# Altium PCB modulo_alimentador_pcbdoc.PcbDoc
Units mm, origin at the board's own origin, x right, y up, seen from the top; angles counter-clockwise.
Board outline 85.5 x 31.5 mm, 2 copper layers (Top Layer, Bottom Layer); 36 components, 22 nets, 96 pads, 43 vias.
Unrouted connection lines stored in the file: 3.
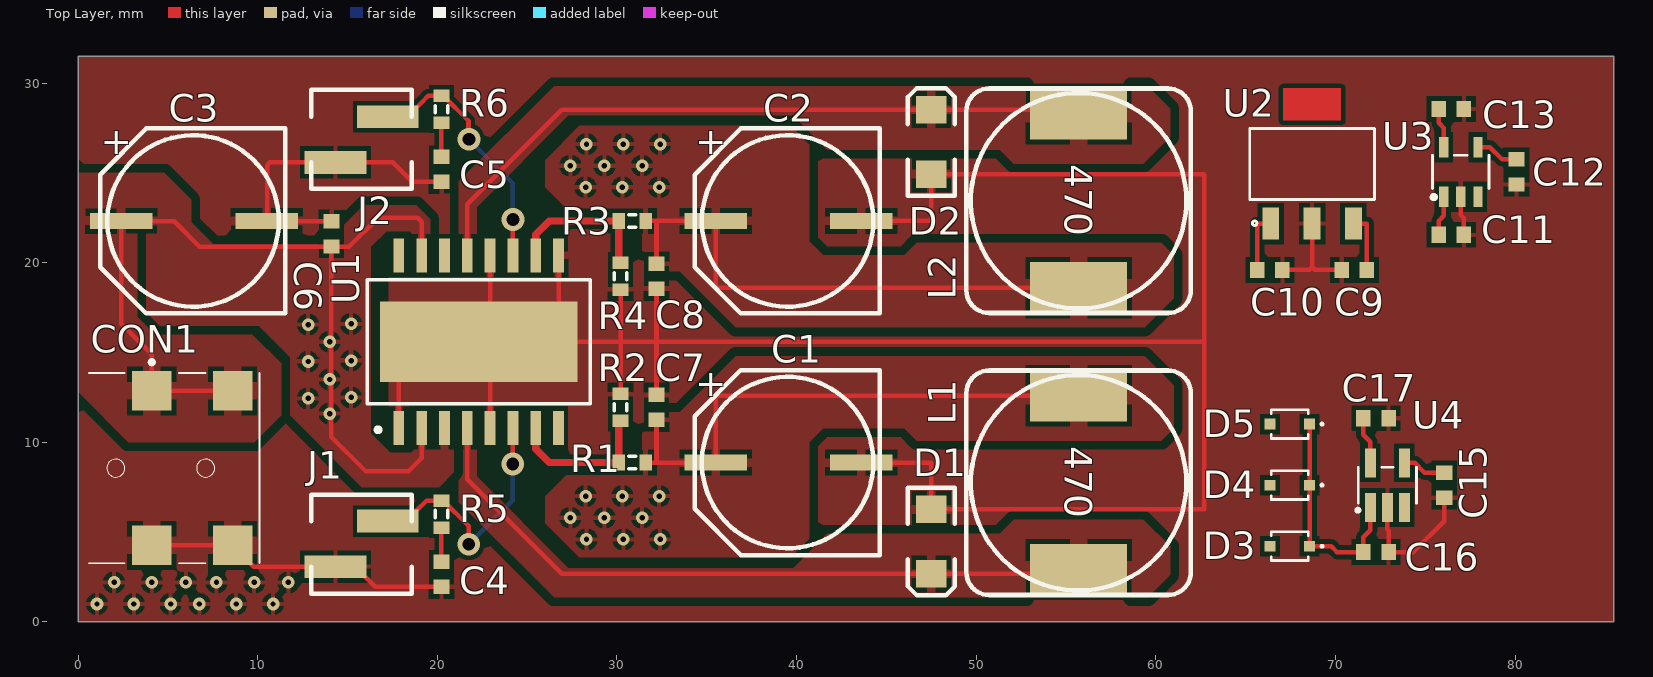
[diagram p0: Top Layer view]
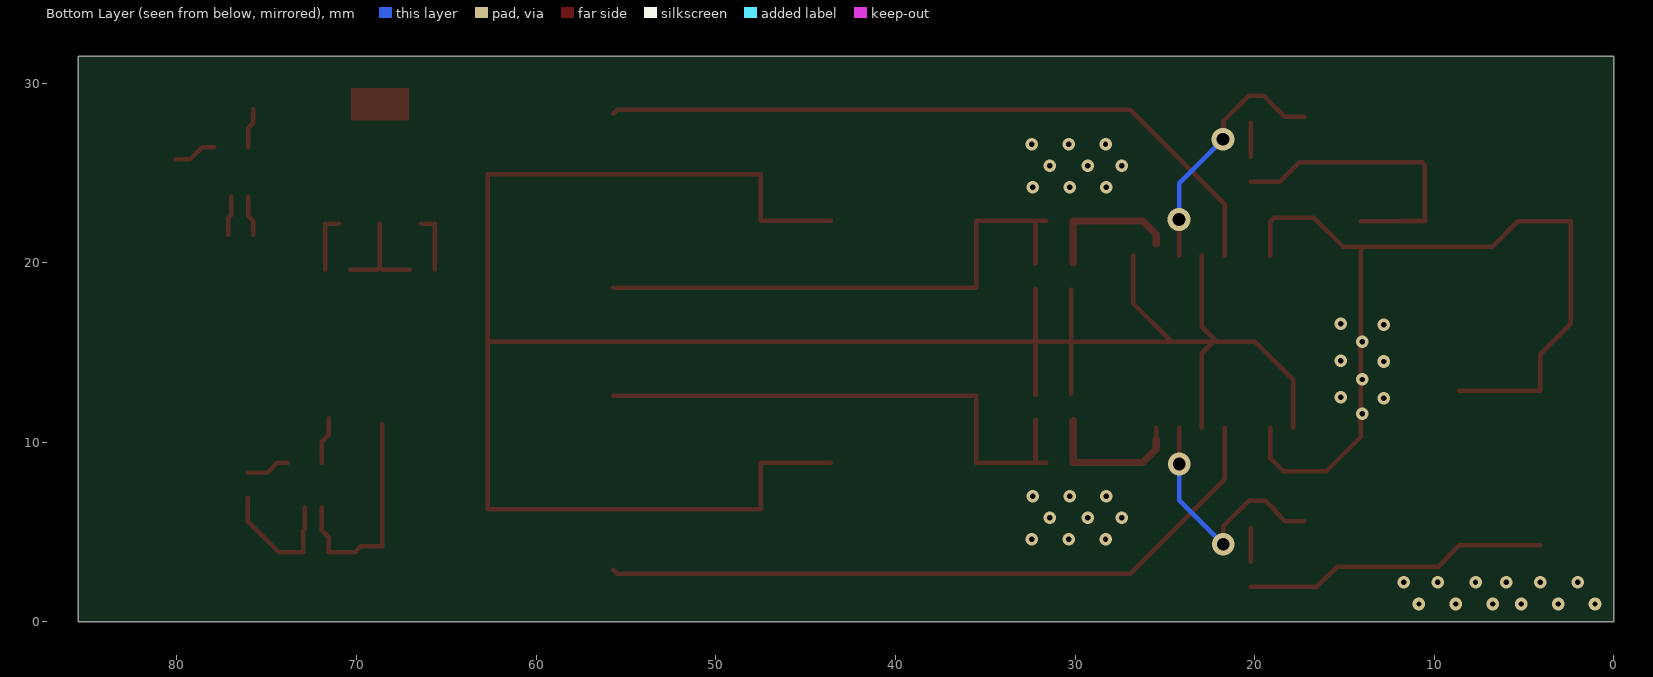
[diagram p1: Bottom Layer view, seen from below]

## Layer stack, top to bottom
Top Solder: solder mask 0.0102, Solder Resist, Dk 3.5
Top Layer: signal copper 0.0356
Dielectric 1: dielectric 0.32, FR-4, Dk 4.8
Bottom Layer: signal copper 0.0356
Bottom Solder: solder mask 0.0102, Solder Resist, Dk 3.5

## Board outline
0,0 0,31.5 85.5,31.5 85.5,0

## Design rules (kind name [scope] priority, off if disabled: settings)
Clearance Clearance_Power [InNetClass('Net_Class_Power')] p1: gap=0.254 ignorepadtopadclearanceinfootprint=FALSE except(0: Arc-Hole Track-Hole SMDPad-Hole THPad-Hole Via-Hole Fill-Hole Poly-Hole Region-Hole Text-Hole; 0.5: Poly-Poly)
Clearance [All] p2: gap=0.254 ignorepadtopadclearanceinfootprint=FALSE except(0: Arc-Hole Track-Hole SMDPad-Hole THPad-Hole Via-Hole Fill-Hole Poly-Hole Region-Hole Text-Hole)
PolygonConnect [All] p1: connectstyle=Relief reliefconductorwidth=0.254 reliefentries=4 polygonreliefangle="90 Angle" airgapwidth=0.254
RoutingVias [All] p1: holewidth=0.711 width=1.27 viastyle="Through Hole" minholewidth=0.711 minwidth=1.27 maxholewidth=0.711 maxwidth=1.27
SolderMaskExpansion [All] p1: expansion=0.102 istentingtop=FALSE
Width Width_FB [InNetClass('Net_Class_FB')] p1: maxlimit=0.5 minlimit=0.254 preferedwidth=0.4
Width [All] p2: maxlimit=0.254 minlimit=0.254 preferedwidth=0.254
30 further rules are at their usual default settings.

## Classes and differential pairs
net class Net_Class_Power: +3V3_MCP1825 +3V3_MIC5301 +3V3_SPI +3V3_STLINK +5V_SPI +5V_STLINK +5V_USB +12V SWout1 SWout2
polygon class Poly_Class_Power: +3V3_SPI +12V_L01_P003 +12V_L01_P004 +12V_L01_P006 +12V_L01_P007 SWOUT1_L01_P011 SWOUT2_L01_P013
net class Net_Class_FB: Vref1 Vref2

## Components (designator, comment, footprint, x,y, rotation, side; value= is the part's Value field where it differs from the comment)
C1 "EEEFC1E471P" PCE4009CT 35.5,8.875 r0 top
C2 "EEEFC1E471P" PCE4009CT 35.5,22.325 r0 top
C3 "EEEFK1H221P" PCE4009CT 2.4,22.325 r0 top
C4 "Cap Semi" 1608[0603] 20.225,2.652 r90 top value=1uF
C5 "Cap Semi" 1608[0603] 20.225,25.198 r90 top value=1uF
C6 "Cap Semi" 1608[0603] 14.1,21.6 r90 top value=100nF
C7 "Cap Semi" 1608[0603] 32.2,11.95 r90 top value=100nF
C8 "Cap Semi" 1608[0603] 32.2,19.25 r270 top value=100nF
C9 "Cap Semi" 1608[0603] 71.052,19.6 r0 top value=1uF
C10 "Cap Semi" 1608[0603] 66.348,19.6 r180 top value=1uF
C11 "Cap Semi" 1608[0603] 76.447,21.554 r0 top value=1uF
C12 "Cap Semi" 1608[0603] 80.076,25.054 r270 top value=10nF
C13 "Cap Semi" 1608[0603] 76.447,28.554 r0 top value=1uF
C15 "Cap Semi" 1608[0603] 76.058,7.615 r270 top value=10nF
C16 "Cap Semi" 1608[0603] 72.258,3.89 r0 top value=1uF
C17 "Cap Semi" 1608[0603] 72.258,11.34 r0 top value=1uF
CON1 "PWR JACK" 694103107102 4.098,4.262 r90 top
D1 "SS26SHE3_A/H" SS26SHE3_A/H 47.5,6.275 r270 top
D2 "SS26SHE3_A/H" SS26SHE3_A/H 47.5,24.925 r90 top
D3 "PMEG1030EJ" PMEG1030EJ 66.358,4.215 r0 top
D4 "PMEG1030EJ" PMEG1030EJ 66.358,7.615 r0 top
D5 "PMEG1030EJ" PMEG1030EJ 66.358,11.015 r0 top
J1 "JUMPER_SMD" JUMPER_SMD 15.785,3.077 r90 top
J2 "JUMPER_SMD" JUMPER_SMD 15.785,28.123 r270 top
L1 "SRR1240-470M" SRR1240-470M 55.7,12.6 r270 top
L2 "SRR1240-470M" SRR1240-470M 55.7,28.3 r270 top
R1 "Res3" J1-0603 30.85,8.875 r0 top value=4K
R2 "Res3" J1-0603 30.2,11.95 r270 top value=1K
R3 "Res3" J1-0603 30.85,22.325 r0 top value=2.3K
R4 "Res3" J1-0603 30.2,19.25 r90 top value=1K
R5 "Res3" J1-0603 20.225,6.002 r90 top value=1K
R6 "Res3" J1-0603 20.225,28.548 r90 top value=1K
U1 "SPI-8001TW" SOP127P1050X275_HS-17N 22.3,15.6 r90 top
U2 "MCP1825S-3302E" MCP1825S-3302E 68.7,25.5 r0 top
U3 "MIC5301-3.3YD5-TR" MIC5301-3.3YD5-TR 76.976,25.054 r90 top
U4 "LD3985M33R" LD3985M33R 72.892,7.615 r90 top value=Value

## Footprints (in the part's own frame and the unit in brackets; to place one, negate y for a bottom-side part, rotate by r counter-clockwise, add the part's x,y. Pads: shape width x height; smd on the part's side, far side on the other; paste and mask are expansions set on the pad)
1608[0603] [mm] "Chip Capacitor, Body 1.6x0.8mm, IPC High Density"
  rect 0.8x0.9 smd: 1(-0.7,0) 2(0.7,0)
  body extent -0.87,-0.48 0.87,0.48, height 1.3
694103107102 [mm]
  rect 2.2x2.2 smd: 1(8.6,-4.5) 1(8.6,0) 2(0,0) 2(0,-4.5)
  silkscreen extent -1,-6 10.3,3.5, body extent -0.6,-5.8 9.2,3.5, height 5.29
J1-0603 [mm] "Chip Resistor, Body 1.6x0.8mm, IPC High Density"
  rect 0.7x0.9 smd: 1(-0.75,0) 2(0.75,0)
  silkscreen extent -0.2,-0.35 0.2,0.35, body extent -0.85,-0.48 0.85,0.48, height 0.9
JUMPER_SMD [mm]
  rect 1.27x3.43 smd: 1(0,1.46) 2(2.54,-1.46)
  silkscreen extent -1.5,-2.8 4,2.8, body extent -1.27,-2.64 3.81,2.64, height 17.21
LD3985M33R [mm]
  rect 1.61x0.608 smd paste+0 mask+0: 1(-1.244,0.95) 2(-1.244,0) 3(-1.244,-0.95) 4(1.244,-0.95) 5(1.244,0.95)
  silkscreen extent -1.46,-1.63 1,1.71, body extent -1.5,-1.5 1.5,1.5, height 1.45
MCP1825S-3302E [mil]
  rect 37x70 smd paste+0 mask+0: 1(-90.55,-130.7) 2(0,-130.7) 3(90.55,-130.7)
  Top Layer region: 63,95.7 63,165.7 -63,165.7 -63,95.7
  silkscreen extent -137,-135 137,78, body extent -132,-144 132,144, height 71
MIC5301-3.3YD5-TR [mil]
  rect 45.5x20 smd paste+0 mask+0: 1(-54.24,37.3) 2(-54.24,-0.1) 3(-54.24,-37.5) 4(54.26,-37.5) 5(54.26,37.3)
  silkscreen extent -59,-62 37,63, body extent -55,-57 55,57, height 39
PCE4009CT [mm]
  rect 3.5x0.9 smd: 1(0,0) 2(8.1,0)
  silkscreen extent -1.18,-5.15 9.12,5.15, body extent -1.77,-5.15 9.83,5.15, height 10.2
PMEG1030EJ [mm]
  rect 0.6x0.6 smd: 1(0,0) 2(2.2,0)
  silkscreen extent 0.07,-0.8 2.91,0.8, body extent -0.15,-0.67 2.35,0.68, height 1
SOP127P1050X275_HS-17N [mm] "SOP, 16-Leads, Body 12,20x7,50mm, Pitch 1,27mm, Thermal Pad 11,00x4,50mm, IPC Medium Density"
  rect 1.9x0.6 smd: 1(-4.8,4.445) 2(-4.8,3.175) 3(-4.8,1.905) 4(-4.8,0.635) 5(-4.8,-0.635) 6(-4.8,-1.905) 7(-4.8,-3.175) 8(-4.8,-4.445) 9(4.8,-4.445) 10(4.8,-3.175) 11(4.8,-1.905) 12(4.8,-0.635) 13(4.8,0.635) 14(4.8,1.905) 15(4.8,3.175) 16(4.8,4.445)
  rect 4.5x11 smd: 17(0,0)
  silkscreen extent -5.02,-6.2 3.45,6.2, body extent -5.15,-5.1 5.15,5.1, height 3.5
SRR1240-470M [mm]
  rect 2.9x5.4 smd: 1(0,0) 2(9.7,0)
  silkscreen extent -1.4,-6.25 11.1,6.25, body extent -1.45,-6.25 11.05,6.25, height 4.5
SS26SHE3_A/H [mm]
  rect 1.52x1.68 smd: 1(0,0) 2(3.6,0)
  silkscreen extent -1.2,-1.3 4.8,1.3, body extent -0.95,-1.4 4.55,1.4, height 2.6

## Part data
C1 C2: "Capacitor 470uf electrolitico", Capacitance=470uF, Case/Package=Radial, ESR (Equivalent Series Resistance)=150mR, Leakage Current=3uA, Manufacturer=Panasonic, Max Operating Temperature=105°C, Min Operating Temperature=-40°C, Package Quantity=1, Ripple Current=670mA, Tolerance=20%, Voltage=25V, Category="Aluminum Electrolytic Capacitors", Contact Plating=Tin, Diameter=10mm, Height=10.2mm, Height - Seated (Max)=0.402inch, Impedance=150mR, Lead Diameter=0.9mm, Lead Free="Lead Free", Lead Pitch=4.6mm, Length=10.5mm, Life (Hours)=1000Hour, Manufacturer Part Number=EEEFC1E471P, Material=Aluminium, Mount="Surface Mount,PCB", Packaging="Tape and Reel", Radiation Hardening=No, REACH SVHC="No SVHC", Ripple Current (AC)=670mA, Termination=SMD/SMT, Voltage Rating=25V, Voltage Rating (DC)=25V, Width=900um
C3: "Capacitor 220uf electrolitico", Capacitance=220uF, Case/Package=Radial, Dielectric Material=Aluminium, ESR (Equivalent Series Resistance)=180mR, Leakage Current=3uA, Manufacturer=Panasonic, Manufacturer Part Number=EEE-FK1H221P, Max Operating Temperature=105°C, Min Operating Temperature=-55°C, Package Quantity=500, Ripple Current=670mA, Tolerance=20%, Voltage=50V, Category="Aluminum Electrolytic Capacitors", Contact Plating=Tin, Diameter=10mm, Height=10.2mm, Height - Seated (Max)=0.413inch, Impedance=180mR, Lead Free="Lead Free", Length=10.2mm, Life (Hours)=2000Hour, Material=Aluminium, Mount="Surface Mount,PCB", Number of Pins=2, Packaging="Tape and Reel", Polarity=Polar, Radiation Hardening=No, REACH SVHC="No SVHC", Ripple Current (AC)=670mA, Termination=SMD/SMT, Voltage Rating=50V, Voltage Rating (DC)=50V, Width=12mm
C4 C5 C6 C7 C8 C9 C10 C11 C12 C13 C15 C16 C17: "Capacitor (Semiconductor SIM Model)", LatestRevisionDate=29-May-2009, LatestRevisionNote="IPC-7351 Footprint Added.", PackageDescription="Chip Capacitor", PackageReference=C1206, Published=8-Jun-2000, Publisher="Altium Limited"
CON1: library part 694103107102, "CONN PWR JACK DC RA SMD", Color=Black, Current Rating=5A, Flammability Rating="UL94 V-0", Insulation Resistance=100MR, Manufacturer="Wurth Electronics", Max Operating Temperature=85°C, Min Operating Temperature=-40°C, Package Quantity=500, Voltage Rating=18V, Category=Connectors, ComponentLink1Description=http://www.mouser.com/ds/2/445/6941xx107102-469263.pdf?src-supplier=Mouser, ComponentLink1URL=http://www.mouser.com/ds/2/445/6941xx107102-469263.pdf?src-supplier=Mouser, ComponentLink2Description=http://www.farnell.com/cad/2130962.pdf?src-supplier=Element14, ComponentLink2URL=http://www.farnell.com/cad/2130962.pdf?src-supplier=Element14, Connector Type=Jack,Power, Contact Gender=Female, Contact Material="Copper Alloy", Contact Plating=Tin, Gender=Male, Housing Material=Polyamide, Manufacturer Part Number=694103107102, Mount="Surface Mount", Packaging="Tape and Reel", Pricing 1="1=1,56000, 10=1,48500, 50=1,32600, 100=1,22000 (USD)", REACH SVHC=Unknown, RoHS=Yes, Shielding=Unshielded, Stock 1=467, Supplier 1=Digi-Key, Termination=SMD/SMT, Voltage Rating (DC)=18V
D1 D2: "Diodo schottky 60V 2A", Average Rectified Current=2A, Case/Package=SMA, Forward Voltage=750mV, Manufacturer=Vishay, Manufacturer Part Number="SS26SHE3\"A/H", Max Forward Surge Current (Ifsm)=40A, Max Operating Temperature=150°C, Max Repetitive Reverse Voltage (Vrrm)=60V, Min Operating Temperature=-55°C, Package Quantity=1800, Peak Reverse Current=10mA, Category="Rectifier Diodes", Element Configuration=Single, Forward Current=2A, Height=2.29mm, Lead Free="Lead Free", Length=4.5mm, Max Reverse Voltage (DC)=60V, Mount="Surface Mount", Number of Pins=2, Packaging="Tape and Reel", Peak Non-Repetitive Surge Current=40A, Radiation Hardening=No, Reverse Voltage (DC)=60V, Termination=SMD/SMT, Weight=0.001199oz, Width=2.79mm
D3 D4 D5: "DIODO SCHOTTKY", Manufacturer=Nexperia, Manufacturer Part Number=PMEG1030EJ,115
J1 J2: "JUMPER SMD Pitch  2.54mm", Color=Black, Manufacturer=Samtec, Manufacturer Part Number=TSM-102-01-L-SV-TR, Max Current Rating=7A, Max Operating Temperature=125°C, Max Voltage Rating (AC)=475V, Min Operating Temperature=-55°C, Category="Headers and Wire Housings", Connector Type="Male Pin", Contact Material=Bronze, Contact Mating Length=0.23inch, Contact Plating=Gold, Depth=2.54mm, Gender=Male, Housing Color=Black, Housing Material=Polymer, Lead Free="Lead Free", Length=5.08mm, Mount="Surface Mount", Number of Contacts=2, Number of Positions=2, Number of Rows=1, Orientation=Straight, Packaging="Tape and Reel", Pitch=2.54mm, Radiation Hardening=No, REACH SVHC="No SVHC", Termination=Solder
L1 L2: "Inductor fijo con nucleo.", Case/Package=Nonstandard, Current Rating=2A, DC Resistance (DCR)=135mR, Frequency=13MHz, Inductance=47uH, Inductance Tolerance=20%, Manufacturer=Bourns, Max Operating Temperature=125°C, Min Operating Temperature=-40°C, Package Quantity=800, Resistance=135MR, Saturation Current=1.8A, Test Frequency=100kHz, Category="Fixed Inductors", Composition=Wirewound, Core Material=Ferrite, DC Current=2A, Depth=12.8mm, Height=4mm, Height - Seated (Max)=0.177inch, Length=12.5mm, Manufacturer Part Number=SRR1240-470M, Material=Steel, Max DC Current=2A, Military Standard=Not, Mount="Surface Mount", Packaging="Cut Tape", Q Factor=19, Radiation Hardening=No, REACH SVHC="No SVHC", RMS Current (Irms)=2A, Self Resonant Frequency=13MHz, Shielding=Shielded, Termination=SMD/SMT, Tolerance=20%, Width=12.5mm
R1 R2 R3 R4 R5 R6: "Resistor", LatestRevisionDate=29-May-2009, LatestRevisionNote="IPC-7351 Footprint Added.", PackageDescription="Chip Resistor", PackageReference=J1-0603, Published=8-Jun-2000, Publisher="Altium Limited"
U1: library part SPI-8001TW-TL, "IC REG BUCK ADJ 1.5A DL 16-HSOP", Case/Package=SOIC, Manufacturer="Allegro MicroSystems Sanken", Max Input Voltage=20V, Max Operating Temperature=135°C, Max Output Voltage=16V, Min Input Voltage=4V, Min Operating Temperature=-30°C, Min Output Voltage=1V, Output Current=1.5A, Package Quantity=1400, Supplier Part Number 1=SPI-8001TW-TLCT-ND, Switching Frequency=250kHz, Category="Voltage Regulators - Switching", ComponentLink1Description=https://datasheet.ciiva.com/29734/spi-8001tw-ds-en-29734001.pdf?src-supplier=Digi-Key, ComponentLink1URL=https://datasheet.ciiva.com/29734/spi-8001tw-ds-en-29734001.pdf?src-supplier=Digi-Key, ComponentLink2Description=https://datasheet.ciiva.com/29733/h1-o03eh0-29733998.pdf?src-supplier=Digi-Key, ComponentLink2URL=https://datasheet.ciiva.com/29733/h1-o03eh0-29733998.pdf?src-supplier=Digi-Key, ComponentLink3Description=https://datasheet.ciiva.com/29733/h1-o03eh0-29733994.pdf?src-supplier=Digi-Key, ComponentLink3URL=https://datasheet.ciiva.com/29733/h1-o03eh0-29733994.pdf?src-supplier=Digi-Key, Manufacturer Part Number=SPI-8001TW-TL, Mount="Surface Mount", Number of Outputs=2, Number of Pins=16, Output Configuration=Positive, Output Type=Adjustable, Packaging="Tape and Reel", Pricing 1="1=3,10000, 10=2,78500, 25=2,63240, 100=2,16450, 250=1,94220, 500=1,87200 (USD)", RoHS=Yes, Stock 1=1392, Supplier 1=Digi-Key, Synchronous Rectifier=No
U2: "MCP1825 Series 500 mA Low Quiescent Current LDO Regulator - SOT-223-3", Manufacturer=Microchip, Manufacturer Part Number=MCP1825S-3302E/DB, Supplier Part Number 1=MCP1825S-3302E/DB-ND, Category="Voltage Regulators - Linear", ComponentLink1Description=https://datasheet.ciiva.com/2040/22056b-2040962.pdf?src-supplier=Digi-Key, ComponentLink1URL=https://datasheet.ciiva.com/2040/22056b-2040962.pdf?src-supplier=Digi-Key, ComponentLink2Description=https://datasheet.ciiva.com/16369/filehandler-aspxddocname-en531698-16369574.pdf?src-supplier=Future+Electronics, ComponentLink2URL=https://datasheet.ciiva.com/16369/filehandler-aspxddocname-en531698-16369574.pdf?src-supplier=Future+Electronics, ComponentLink3Description=https://datasheet.ciiva.com/3224/22056b-3224139.pdf?src-supplier=Avnet, ComponentLink3URL=https://datasheet.ciiva.com/3224/22056b-3224139.pdf?src-supplier=Avnet, ComponentLink4Description=https://datasheet.ciiva.com/8041/514217-8041499.pdf?src-supplier=Element14, ComponentLink4URL=https://datasheet.ciiva.com/8041/514217-8041499.pdf?src-supplier=Element14, Pricing 1="1=0,51000, 25=0,43000, 100=0,39000 (USD)", RoHS=Yes, Stock 1=2086, Supplier 1=Digi-Key
U3: "LDO VOLT REG, 0.15A, 3.3V, TSOT-23-5; Input Voltage Min:2.3V; Input Voltage Max:5.5V; Output Voltage Nom.:3.3V; Output Current:150mA; Dropout Voltage Vdo:40mV; LDO Regulator Case Style:TSOT-23; No. of Pins:5; Operating Temperature Min:-40°C; Operating Temperature Max:125°C; Packaging:Cut Tape; MSL:MSL 1 - Unlimited; SVHC:No SVHC (15-Jun-2015)", Manufacturer=Microchip, Supplier Part Number 1=576-2840-1-ND, Category="Voltage Regulators - Linear", ComponentLink1Description=https://datasheet.ciiva.com/2049/mic5301-2049830.pdf?src-supplier=Digi-Key, ComponentLink1URL=https://datasheet.ciiva.com/2049/mic5301-2049830.pdf?src-supplier=Digi-Key, ComponentLink2Description=https://datasheet.ciiva.com/46425/1670788-46425623.pdf?src-supplier=Element14, ComponentLink2URL=https://datasheet.ciiva.com/46425/1670788-46425623.pdf?src-supplier=Element14, Manufacturer Part Number=MIC5301-3.3YD5-TR, Pricing 1="1=0,59000, 25=0,49000, 100=0,45000 (USD)", RoHS=Yes, Stock 1=2373, Supplier 1=Digi-Key
U4: "LDO Regulator Pos 3.3V 0.55A 5-Pin SOT-23 T/R", Case/Package=SOT-23, Dropout Voltage=60mV, Input Bias Current=85uA, Manufacturer=STMicroelectronics, Max Input Voltage=6V, Max Operating Temperature=125°C, Max Output Current=150mA, Min Current Limit=300mA, Min Input Voltage=2.5V, Min Operating Temperature=-40°C, Min Output Voltage=3.3V, Output Voltage Accuracy=2%, Package Quantity=1, Quiescent Current=150uA, Supplier Part Number 1=497-3504-1-ND, Accuracy=2%, Built_By=EMA_UL_Team, Category="Voltage Regulators - Linear", ComponentLink1Description=https://datasheet.ciiva.com/41440/001185181-da-01-en-ic-reg-ldo-3-3v-ld3985m33r-sot-23-5-stm-41440289.pdf?src-supplier=Conrad, ComponentLink1URL=https://datasheet.ciiva.com/41440/001185181-da-01-en-ic-reg-ldo-3-3v-ld3985m33r-sot-23-5-stm-41440289.pdf?src-supplier=Conrad, ComponentLink2Description=https://datasheet.ciiva.com/26905/ld3985m33r-26905032.pdf?src-supplier=IIIC, ComponentLink2URL=https://datasheet.ciiva.com/26905/ld3985m33r-26905032.pdf?src-supplier=IIIC, ComponentLink3Description=https://datasheet.ciiva.com/2042/cd00003395-2042198.pdf?src-supplier=Digi-Key, ComponentLink3URL=https://datasheet.ciiva.com/2042/cd00003395-2042198.pdf?src-supplier=Digi-Key, ComponentLink4Description=https://datasheet.ciiva.com/2042/cd00003395-2042200.pdf?src-supplier=Digi-Key, ComponentLink4URL=https://datasheet.ciiva.com/2042/cd00003395-2042200.pdf?src-supplier=Digi-Key, ComponentLink5Description=https://datasheet.ciiva.com/2042/cd00003395-2042199.pdf?src-supplier=Digi-Key, ComponentLink5URL=https://datasheet.ciiva.com/2042/cd00003395-2042199.pdf?src-supplier=Digi-Key, ComponentLink6Description=https://datasheet.ciiva.com/16591/cd00003395-16591967.pdf?src-supplier=Avnet+Europe, ComponentLink6URL=https://datasheet.ciiva.com/16591/cd00003395-16591967.pdf?src-supplier=Avnet+Europe, Copyright="Copyright (C) 2018 Accelerated Designs. All rights reserved", Height=1.3mm, Lead Free="Lead Free", Length=3mm, Manufacturer Part Number=LD3985M33R, Manufacturer_Part_Number=LD3985M33R, Mount="Surface Mount", Number of Outputs=1, Number of Pins=5, Number of Regulators=1, Output Current=150mA, Output Type=Fixed, Output Voltage=3.3V, Packaging="Tape and Reel", Polarity=Positive, Pricing 1="1=0,60000, 10=0,52800, 25=0,49600, 100=0,37600, 250=0,32000, 500=0,30400, 1000=0,23200 (USD)", Radiation Hardening=No, RefDes=RefDes, RoHS=Yes, Stock 1=4469, Supplier 1=Digi-Key, Type=DEV, Vendor=STMicroelectronics, Width=1.75mm

## Via types
v1: diameter 0.7, hole 0.3, Top Layer to Bottom Layer, 39 vias
v2: diameter 1.27, hole 0.711, Top Layer to Bottom Layer, 4 vias

## Nets (pads, with @x,y where several pads share a name; then routed paths per layer and width w, separated by ;. In a path a pad name is that pad's centre, name@x,y a point inside that pad or via, vN(x,y) a via of type N, cw(c..) or ccw(c..) an arc to the next point about the centre after c; other vN are vias at no path point)
+3V3_MCP1825: C9.2 U2.3 | length 3.3
  Top Layer w0.254: U2.3 71.752,22.18 C9.2
+3V3_MIC5301: C13.1 U3.5 | length 2.2
  Top Layer w0.254: C13.1 75.747,27.783 76.028,27.502 U3.5
+3V3_SPI: C2.1 C8.1 L2.2 R3.2 | length 30.2
  Top Layer w0.254: R3.2 32.2,22.325 ; C8.1 32.2,22.325 ; L2.2 35.5,18.6 C2.1 32.2,22.325
  other v1: 28.25,24.2 30.3,24.2 32.35,24.2 27.4,25.4 29.3,25.4 31.4,25.4 28.3,26.6 30.35,26.6 32.4,26.6
+3V3_STLINK: C17.1 U4.5 | length 2.6
  Top Layer w0.254: C17.1 71.558,10.415 71.942,10.031 U4.5
+5V_SPI: C1.1 C7.1 C10.2 C11.1 D3.1 L1.1 R1.2 U2.1 U3.1 | length 35.8
  Top Layer w0.254: R1.2 32.2,8.875 ; C7.1 32.2,8.875 ; L1.1 35.5,12.6 C1.1 32.2,8.875 ; C10.2 65.648,22.18 U2.1 ; C11.1 75.747,22.326 76.028,22.607 U3.1
  other v1: 28.3,4.6 30.35,4.6 32.4,4.6 27.4,5.8 29.3,5.8 31.4,5.8 28.25,7 30.3,7 32.35,7
+5V_STLINK: C16.1 D3.2 D4.2 D5.2 U4.1 | length 12.6
  Top Layer w0.254: D5.2 D4.2 D3.2 69.759,4.215 70.084,3.89 C16.1 71.558,4.715 71.942,5.099 U4.1
+5V_USB: D4.1
+12V: C3.1 C6.1 CON1.1 U1.2 U1.3 U1.15 | length 53
  Top Layer w0.254: CON1.1@8.598,12.862 4.098,12.862 4.098,14.902 2.4,16.6 C3.1 2.425,22.3 5.351,22.3 6.751,20.9 C6.1 ; U1.2 19.125,9.125 18.4,8.4 16,8.4 14.1,10.3 C6.1 ; U1.15 19.125,22.275 18.9,22.5 16.7,22.5 15.1,20.9 C6.1
  other v1: 14,11.6 12.8,12.45 15.2,12.5 14,13.5 12.8,14.5 15.2,14.55 14,15.6 12.8,16.55 15.2,16.6
BYPASS: C15.1 U4.4 | length 2.4
  Top Layer w0.254: U4.4 74.415,8.859 74.958,8.315 C15.1
C/E: U1.14
GND: C1.2 C2.2 C3.2 C4.1 C5.1 C6.2 C7.2 C8.2 C9.1 C10.1 C11.2 C12.2 C13.2 C15.2 C16.2 C17.2 CON1.2 D1.1 D2.1 J1.1 J2.2 R2.1 R4.1 U1.1 U1.5 U1.9 U1.12 U1.17 U2.2 U3.2 U4.2 | length 189
  Top Layer w0.254: CON1.2@4.098,4.262 8.598,4.262 9.783,3.077 J1.1 15.405,3.077 16.53,1.952 C4.1 ; C3.2@11.8,22.325 C3.2 ; C6.2 14.097,22.297 10.528,22.297 C3.2 ; U1.1 17.855,13.477 19.978,15.6 U1.17@22.1,15.6 ; C5.1 18.602,24.498 17.517,25.583 J2.2 10.677,25.583 10.528,25.434 10.528,22.354 C3.2 ; U1.5 22.935,14.965 U1.17 ; U1.12 22.935,16.435 U1.17@22.1,15.6 ; U1.9 26.745,17.723 U1.17@24.622,15.6 ; R2.1 30.2,15.6 ; R4.1 30.2,15.6 ; C7.2 32.2,15.6 ; C8.2 32.2,15.6 ; C1.2 47.5,8.875 D1.1 62.7,6.275 62.7,15.6 ; C2.2 47.5,22.325 D2.1 62.7,24.925 62.7,15.6 ; C10.1 68.551,19.6 68.7,19.749 ; U2.2 68.7,19.749 ; C9.1 68.849,19.6 68.7,19.749 ; U4.2 72.892,5.149 72.958,5.082 C16.2 74.334,3.89 76.058,5.615 C15.2 ; U3.2 76.978,22.657 77.147,22.488 C11.2 ; U1.17@22.1,15.6 U1.17 ; U1.17 U1.17@24.622,15.6 ; U1.17@24.622,15.6 30.2,15.6 ; 30.2,15.6 32.2,15.6 ; 32.2,15.6 62.7,15.6
  other v1: 1.05,1 3.1,1 5.15,1 6.75,1 8.8,1 10.85,1 2,2.2 4.1,2.2 6,2.2 7.7,2.2 9.8,2.2 11.7,2.2
INHIBIT: U4.3
NetC4_2: C4.2 R5.1 | length 1.9
  Top Layer w0.254: C4.2 R5.1
NetC5_2: C5.2 R6.1 | length 1.9
  Top Layer w0.254: C5.2 R6.1
NetC12_1: C12.1 U3.4 | length 2.4
  Top Layer w0.254: U3.4 78.597,26.432 79.276,25.754 C12.1
NetU3_3: U3.3
SS1: J1.2 R5.2 U1.6 | length 14.1
  Top Layer w0.254: J1.2 18.325,5.617 18.833,6.125 18.833,6.191 19.394,6.752 R5.2 20.325,6.752 21.736,5.341 21.736,4.339 v2(21.75,4.325) ; v2(24.2,8.8) 24.202,8.802 24.202,10.797 U1.6
  Bottom Layer w0.254: v2(21.75,4.325) 24.2,6.775 v2(24.2,8.8)
SS2: J2.1 R6.2 U1.11 | length 14.1
  Top Layer w0.254: J2.1 18.325,28.123 19.2,28.998 19.2,29 19.498,29.298 R6.2 20.325,29.298 21.732,27.891 21.732,26.898 v2(21.755,26.875) ; U1.11@24.207,20.402 v2@24.207,22.397
  Bottom Layer w0.254: v2(21.755,26.875) 24.205,24.425 v2(24.205,22.4)
SWout1: D1.2 L1.2 U1.4 | length 39.2
  Top Layer w0.254: U1.4 21.665,7.935 26.925,2.675 D1.2 55.475,2.675 L1.2
SWout2: D2.2 L2.1 U1.13 | length 39.2
  Top Layer w0.254: U1.13 21.665,23.265 26.925,28.525 D2.2 55.475,28.525 L2.1
Vref1: R1.1 R2.2 U1.7 | length 8.5
  Top Layer w0.254: U1.7@25.475,10.15 U1.7 ; R2.2@30.1,11.2 R2.2
  Top Layer w0.4: U1.7@25.475,10.15 25.475,9.625 26.225,8.875 R1.1 R2.2@30.1,11.2
Vref2: R3.1 R4.2 U1.10 | length 7.9
  Top Layer w0.254: R4.2@30.1,20 R4.2
  Top Layer w0.4: U1.10@25.475,21.05 25.475,21.575 26.225,22.325 R3.1 R4.2@30.1,20
pads on no net: D5.1 U1.8 U1.16

## Polygon pours and split planes (outlines as drawn)
+3V3_SPI on Top Layer "+3V3_SPI" (solid, pour order 14): 36.612,16.4 33.5,19.512 31.4,19.512 31.4,22.862 31.225,23.037 27.175,23.037 26,24.212 26,25.712 27.9,27.612 39.7,27.612 40.7,26.612 40.7,21.2 41.488,20.412 46,20.412 46.7,21.112 60.3,21.112 61,20.412 61,18.012 59.388,16.4
SWout2 on Top Layer "SWOUT2_L01_P013" (solid, pour order 13): 21.2,24.525 26.5,29.825 59.55,29.825 60.8,28.575 60.8,27 59.3,25.5 52.1,25.5 51.3,26.3 41.7,26.3 39.8,28.2 27.3,28.2 22.2,23.1 22.2,21 21.2,21
SWout1 on Top Layer "SWOUT1_L01_P011" (solid, pour order 11): 21.2,6.675 26.5,1.375 59.55,1.375 60.8,2.625 60.8,4.2 59.3,5.7 52.1,5.7 51.3,4.9 41.7,4.9 39.8,3 27.3,3 22.2,8.1 22.2,10.2 21.2,10.2
+5V_SPI on Top Layer "+5V_SPI" (solid, pour order 8): 36.612,14.8 33.5,11.688 31.4,11.688 31.4,8.338 31.225,8.163 27.175,8.163 26,6.988 26,5.488 27.9,3.588 39.7,3.588 40.7,4.588 40.7,10 41.488,10.788 46,10.788 46.7,10.088 60.3,10.088 61,10.788 61,13.188 59.388,14.8
GND on Top Layer "GND_L01_P000" (solid, pour order 0): 85.5,0 0,0 0,31.5 85.5,31.5
+12V on Top Layer "+12V_L01_P004" (solid, pour order 4): 6.3,22.25 7.525,21.025 13.4,21.025 16.3,21.025 16.3,14.75 12.8,14.75 11.8,14.75 10.05,16.5 4.55,16.5 3.8,17.25 3.8,22.75 0.05,22.75 0.05,25 4.8,25 6.3,23.5
+12V on Top Layer "+12V_L01_P003" (solid, pour order 3): 11.3,14.4 9.7,16 4.3,16 3.3,17 3.3,22.75 0.05,22.75 0.05,12.75 2.8,10 9.8,10 11.3,11.5
+12V on Top Layer "+12V_L01_P007" (solid, pour order 7): 16.3,20.875 17.175,21.75 18.45,21.75 18.6,21.6 18.6,20.66 18.825,20.4 19.425,20.4 19.6,20.639 19.6,22.425 18.825,23.2 15.9,23.2 14.8,22.1 14.8,20.875
+12V on Top Layer "+12V_L01_P006" (solid, pour order 6): 11.8,14.75 11.8,11.5 15.8,7.5 20.1,7.5 20.925,8.325 20.925,10.27 20.695,10.5 20.1,10.5 20.1,9.6 19.425,9.6 19.425,10.5 18.825,10.5 18.825,9.6 18.712,9.6 18.516,9.425 17.375,9.425 16.3,10.5 16.3,14.75
no net on Top Layer "NONET_L01_P002" (hatched 90Degree grid 1 track 0.3, pour order 2): 44.9,49.7

## Other copper
Top Layer:
  pour cut-out: 17.3,21.5 17.3,9.8 16.6,10.5 16.6,20.7
  pour cut-out: 22.405,21.5 25.005,21.5 25.005,21.7 26.005,22.7 27.005,22.7 25.605,24.1 25.605,26.1 22.505,23 22.405,22.9
  pour cut-out: 22.4,9.7 25,9.7 25,9.5 26,8.5 27,8.5 25.6,7.1 25.6,5.1 22.5,8.2 22.4,8.3
  text "+ Remplazar vias por stiching. / + poner stichin bajo el pad del regulador, / + hacer calculos de corriente por cada pista. / + hacer calculos de corriente por cada grupo de stiching. / + ver si es recomendable cambiar los poligonos slice / + colocar pista para el CE pin 14+ conectar los planos de potencia. / + TEST POINT" at -0.1,37.1 h1

## Text inside footprints (layer, text, board x,y; h text height)
C1: Mechanical 13 "+" at 34.354,12.575 h1.52; Top Overlay "+" at 34.354,12.575 h1.52
C2: Mechanical 13 "+" at 34.354,26.025 h1.52; Top Overlay "+" at 34.354,26.025 h1.52
C3: Mechanical 13 "+" at 1.254,26.025 h1.52; Top Overlay "+" at 1.254,26.025 h1.52
L1: Top Overlay "470" at 54.938,9.781 h1.52 r270
L2: Top Overlay "470" at 54.938,25.481 h1.52 r270